# Altium PCB LED Matrix Pcb_Final.PcbDoc
Units mil, origin at the board's own origin, x right, y up, seen from the top; angles counter-clockwise.
Board outline 5310.03 x 4495.03 mil, 2 copper layers (Top Layer, Bottom Layer); 20 components, 68 nets, 198 pads, 59 vias.
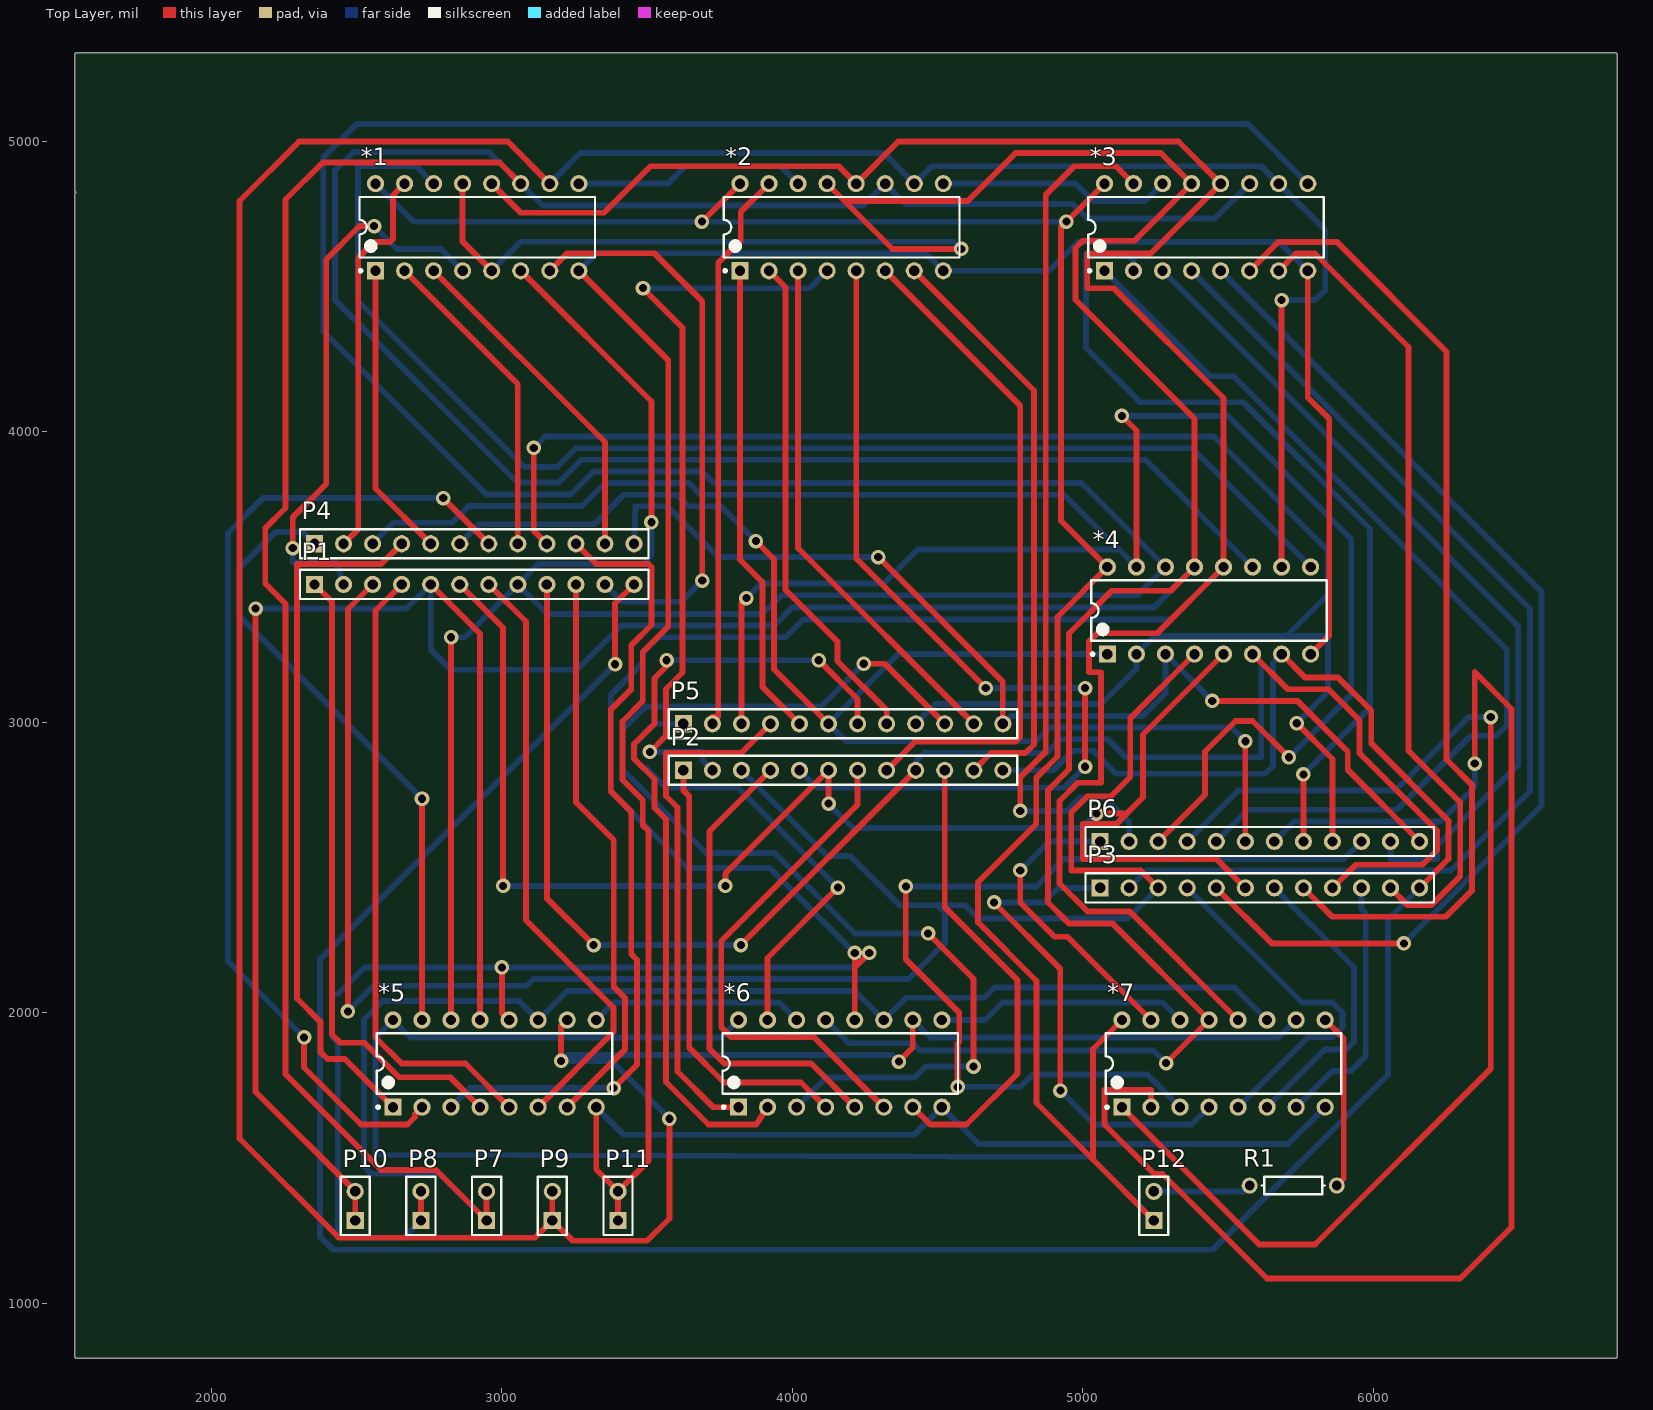
[diagram p0: Top Layer view]
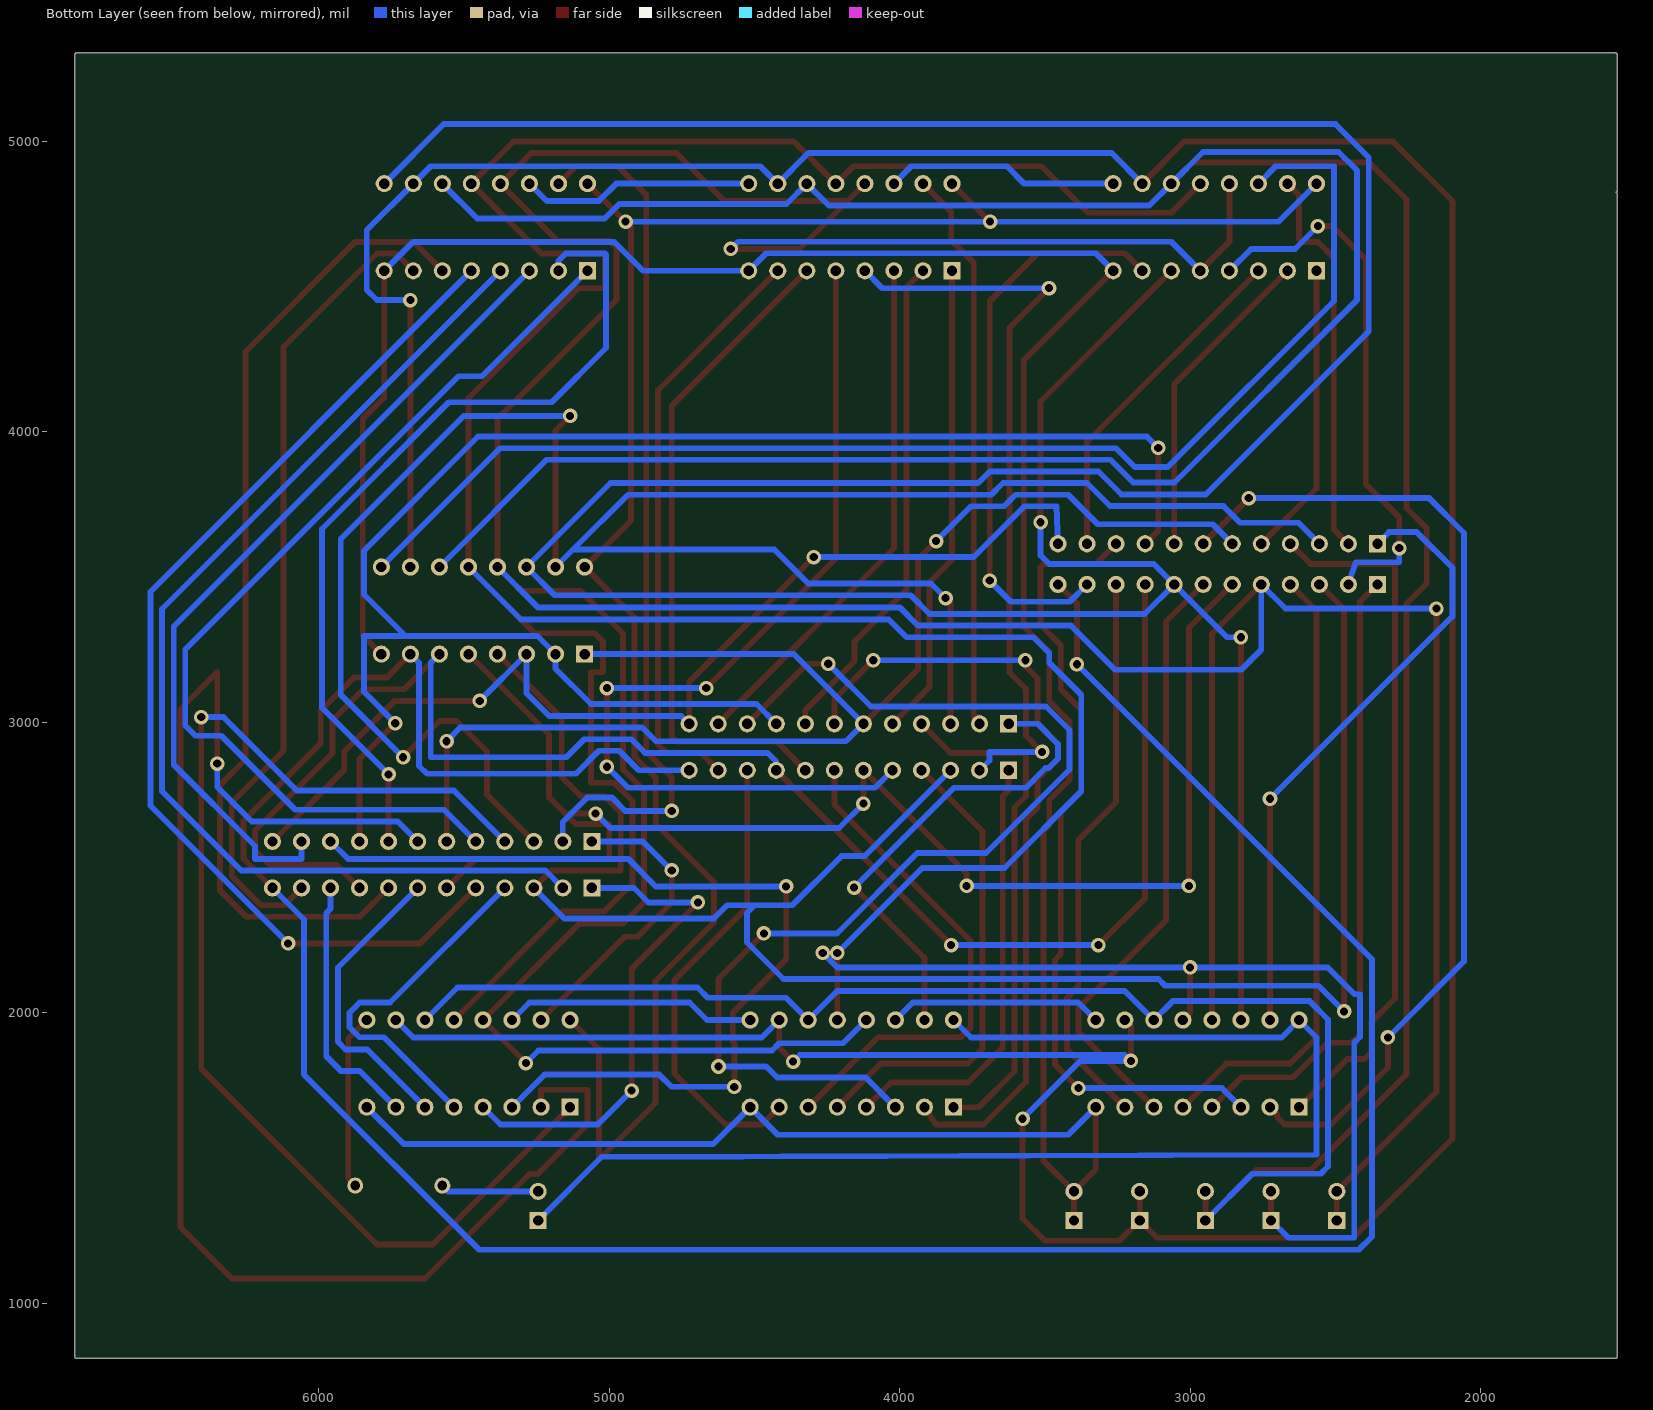
[diagram p1: Bottom Layer view, seen from below]

## Layer stack, top to bottom
Top Solder: solder mask 0.4, Solder Resist, Dk 3.5
Top Layer: signal copper 1.4
Dielectric 1: dielectric 12.6, FR-4, Dk 4.8
Bottom Layer: signal copper 1.4
Bottom Solder: solder mask 0.4, Solder Resist, Dk 3.5

## Board outline
1529.98,815 1529.98,4820 cw(c1535,4820) 1534.61,4825 cw(c1535,4830) 1529.98,4830 1529.98,5300 cw(c1535,5300) 1535,5305.02 6835,5305.02 cw(c6835,5300) 6840.02,5300 6840.02,815 cw(c6835,815) 6835,809.99 1535,809.99 cw(c1535,815)

## Design rules (kind name [scope] priority, off if disabled: settings)
Clearance [All] p1: gap=20
PolygonConnect [All] p1: connectstyle=Relief reliefconductorwidth=10 reliefentries=4 polygonreliefangle="90 Angle" airgapwidth=10
RoomDefinition "Senior design LED matrix 3.0" [InComponentClass('Senior design LED matrix 3.0')] p1: confinementstyle=ConfineIn formatcopy=TRUE lockcomponents=FALSE outline 6990,1055 12185,1055 12185,2375 6990,2375
RoutingVias [All] p1: holewidth=28 width=50 viastyle="Through Hole" minholewidth=28 minwidth=50 maxholewidth=28 maxwidth=50
SolderMaskExpansion [All] p1: expansion=4
Width [All] p1: maxlimit=40 minlimit=20 preferedwidth=20
Width Ground [InNet('Net*1_8')] p2: maxlimit=40 minlimit=30 preferedwidth=30
30 further rules are at their usual default settings.

## Components (designator, comment, footprint, x,y, rotation, side; value= is the part's Value field where it differs from the comment)
*1 "Red_1" DIP-16 2915,4705 r90 top
*2 "Red_2" DIP-16 4170,4705 r90 top
*3 "Red_3" DIP-16 5425,4705 r90 top
*4 "Ground" DIP-16 5435,3385 r90 top
*5 "Green_1" DIP-16 2975,1825 r90 top
*6 "Green_2" DIP-16 4165,1825 r90 top
*7 "Green_3" DIP-16 5485,1825 r90 top
P1 "Header 12" HDR1X12 2355,3475 r0 top
P2 "Header 12" HDR1X12 3625,2835 r0 top
P3 "Header 12" HDR1X12 5060,2430 r0 top
P4 "Header 12" HDR1X12 2355,3615 r0 top
P5 "Header 12" HDR1X12 3625,2995 r0 top
P6 "Header 12" HDR1X12 5060,2590 r0 top
P7 "11" HDR1X2 2947.5,1285 r90 top
P8 "12" HDR1X2 2721.25,1285 r90 top
P9 "10" HDR1X2 3173.75,1285 r90 top
P10 "13" HDR1X2 2495,1285 r90 top
P11 "Ground 8" HDR1X2 3400,1285 r90 top
P12 "1 (Power) 2 (Ground)" HDR1X2 5245,1285 r90 top
R1 "Res1" AXIAL-0.3 5725,1405 r180 top

## Footprints (in the part's own frame and the unit in brackets; to place one, negate y for a bottom-side part, rotate by r counter-clockwise, add the part's x,y. Pads: shape width x height; smd on the part's side, far side on the other; paste and mask are expansions set on the pad)
AXIAL-0.3 [mm] "Axial Device, Thru-Hole; 2 Leads; 0.3 in Pin Spacing"
  round 1.4 hole 0.85: 1(-3.81,0) 2(3.81,0)
  silkscreen extent -2.77,-0.76 2.77,0.76
DIP-16 [mm] "DIP; 16 Leads; Row Spacing 7.62 mm; Pitch 2.54 mm"
  rect 1.5x1.5 hole 0.9: 1(-3.81,8.89)
  round 1.5 hole 0.9: 2(-3.81,6.35) 3(-3.81,3.81) 4(-3.81,1.27) 5(-3.81,-1.27) 6(-3.81,-3.81) 7(-3.81,-6.35) 8(-3.81,-8.89) 9(3.81,-8.89) 10(3.81,-6.35) 11(3.81,-3.81) 12(3.81,-1.27) 13(3.81,1.27) 14(3.81,3.81) 15(3.81,6.35) 16(3.81,8.89)
  silkscreen extent -3.93,-10.3 2.65,10.31, body extent -3.6,-10.28 3.6,10.28, height 5.08
HDR1X2 [mm] "Connector; Header; 2 Position"
  rect 1.5x1.5 hole 0.9: 1(0,0)
  round 1.5 hole 0.9: 2(2.54,0)
  silkscreen extent -1.27,-1.27 3.81,1.27
HDR1X12 [mm] "Connector; Header; 12 Position"
  rect 1.5x1.5 hole 0.9: 1(0,0)
  round 1.5 hole 0.9: 2(2.54,0) 3(5.08,0) 4(7.62,0) 5(10.16,0) 6(12.7,0) 7(15.24,0) 8(17.78,0) 9(20.32,0) 10(22.86,0) 11(25.4,0) 12(27.94,0)
  silkscreen extent -1.27,-1.27 29.21,1.27

## Part data
*1 *2 *3 *4 *5 *6 *7: library part Component_1
P1 P2 P3 P4 P5 P6: "Header, 12-Pin"
P7 P8 P9 P10 P11 P12: library part "Header 2", "Header, 2-Pin"
R1: "Resistor"

## Via types
v1: diameter 50, hole 28, Top Layer to Bottom Layer, 59 vias

## Nets (pads, with @x,y where several pads share a name; then routed paths per layer and width w, separated by ;. In a path a pad name is that pad's centre, name@x,y a point inside that pad or via, vN(x,y) a via of type N, cw(c..) or ccw(c..) an arc to the next point about the centre after c; other vN are vias at no path point)
Net*1_1: *1.1 P4.5 | length 1018.7
  Top Layer w20: *1.1 2565,3805 P4.5
Net*1_2: *1.2 P4.8 | length 1101.5
  Top Layer w20: *1.2 3055,4165 P4.8
Net*1_3: *1.3 P4.11 | length 1184.4
  Top Layer w20: *1.3 3355,3965 P4.11
Net*1_4: *1.4 P1.2 | length 1901.4
  Top Layer w20: v1(2280,3600) 2280,3706 2395,3821 2395,4594 2510,4709 v1(2560,4709)
  Bottom Layer w20: v1(2280,3600) 2280,3551 2429,3551 P1.2 ; v1(2560,4709) 2639,4630 2790,4630 *1.4
Net*1_5: *1.5 *1.13 *2.13 *3.13 *4.13 *5.13 *6.13 *7.13 P1.5 P10.1 P10.2 | length 16767.2
  Top Layer w20: v1(2152,3392) 2152,1728 P10.2 P10.1 ; P1.5 2925,3305 *5.13 ; *1.13 2865,4655 *1.5 ; *2.13 4180,4795 ; v1(4582,4630) 4345,4630 4180,4795 ; v1(5287,1827) *7.13 5102.13,2307.87 4952.13,2307.87 4880.47,2379.53 4880.47,2766.29 4953,2838.82 4953,3306 5100,3453 5303,3453 *4.13 5385,4045 4975,4455 4975,4633 5000,4658 5178,4658 *3.13 5270,4960 4769,4960 4604,4795 4180,4795
  Bottom Layer w20: v1(2152,3392) 2672,3392 P1.5 2755,3250 2824,3181 3258.63,3181 3410.63,3333 3937,3333 4000,3396 5246,3396 *4.13 ; *1.5 3065,4655 4557,4655 v1(4582,4630) ; *6.13 4195,1895 4414.71,1895 4439.71,1870 5244,1870 v1(5287,1827)
Net*1_6: *1.6 *3.9 *4.14 *5.14 P1.8 | length 13053.7
  Top Layer w20: *5.14 v1(2825,3293) ; *1.6 3515,4105 v1(3515,3689)
  Bottom Layer w20: v1(2825,3293) 2873,3293 P1.8 ; v1(3515,3689) 3515,3575 3485,3545 3125,3545 P1.8 ; *3.9 5570,5060 2500,5060 2385,4945 2385,4346.02 2946.35,3784.67 3236,3784.67 3315.33,3864 3690,3864 3730,3824 4996,3824 *4.14 5187.89,3437.89 3962.08,3437.89 3897.18,3373 3157,3373 P1.8
Net*1_7: *1.7 P1.11 | length 1969.9
  Top Layer w20: *1.7 3225,4615 3525,4615 3690,4450 v1(3690,3488)
  Bottom Layer w20: P1.11 3414.53,3415.47 3617.47,3415.47 v1(3690,3488)
Net*1_8: *1.8 *2.8 *3.8 *4.8 *5.8 *6.8 *7.8 P11.1 P11.2 | length 10578.5
  Top Layer w20: *1.8 3573,4247 3573,3330.03 3485.47,3242.5 3485.47,3073.79 3415,3003.31 3415,2802.7 3485.47,2732.23 3485.47,2646 3505.47,2626 3505.47,1490.47 P11.2 ; *5.8 3325,1460 P11.2 ; P11.1 P11.2 ; *3.8 5775,4119 5849,4045 5849,3299 *4.8
  Bottom Layer w20: *1.8 3325,4615 4460,4615 *2.8 4884.3,4555 4983.82,4654.53 5675.47,4654.53 *3.8 ; *5.8 3420.04,1579.96 4419.96,1579.96 *6.8 4642,1548 5708,1548 *7.8
Net*1_9: *1.9 *2.14 | length 804.7
  Bottom Layer w20: *1.9 3571,4855 3631,4915 3960,4915 *2.14
Net*1_10: *1.10 *2.10 *3.10 *4.10 *5.10 *6.10 *7.10 P9.1 P9.2 | length 14073.6
  Top Layer w20: *1.10 3020,5000 2302,5000 2097,4795 2097,1567 2439,1225 3113.75,1225 P9.1 ; P9.2 P9.1 ; v1(3204,1834) 3204,1954 *5.10 ; v1(3577,1635) 3577,1292 3500,1215 3243.75,1215 P9.1 ; v1(4367,1832) 4415,1880 *6.10 ; *4.10 v1(5685,4454)
  Bottom Layer w20: *1.10 3271,4961 4314,4961 *2.10 4480,4915 5615,4915 *3.10 5835,4695 5835,4489 5800,4454 v1(5685,4454) ; v1(3577,1635) 3378,1834 v1(3204,1834) 3225,1855 4344,1855 v1(4367,1832) ; *6.10 4475,1915 5675,1915 *7.10
Net*1_11: *1.11 *2.11 *3.11 *4.11 *5.11 *6.11 *7.11 P7.1 P7.2 | length 16741.9
  Top Layer w20: P7.2 P7.1 2773.5,1459 2584.31,1459 2255,1788.31 2255,3408.67 2185.47,3478.2 2185.47,3668.2 2255,3737.73 2255,4800 2383,4928 2992,4928 *1.11
  Bottom Layer w20: P7.1 2786.5,1446 2550,1446 2525,1471 2525,1977 2588,2040 3060,2040 *5.11 3225,2075 4215,2075 *6.11 4392,2052 4661,2052 4696,2087 5523,2087 *7.11 ; *3.11 5455,4735 5016,4735 4966,4785 4390,4785 *2.11 4244.52,4779.52 3140.48,4779.52 *1.11 2956,4964 2489,4964 2425,4900 2425,4455 3053.85,3826.15 3196,3826.15 3273.85,3904 5216,3904 *4.11
Net*1_12: *1.12 *2.12 *3.12 *4.12 *5.12 *6.12 *7.12 P8.1 P8.2 | length 14383.3
  Top Layer w20: P8.1 P8.2 ; *1.12 3065,4755 3352,4755 3512,4915 4160,4915 *2.12 4365,5000 5330,5000 *3.12 5234.53,4614.53 5015.47,4614.53 5015.47,4495 5107.13,4495 5485,4117.13 *4.12 5257.01,3307.01 5050,3307.01 5022.01,3279.02 5022.01,3172.78 5063,3172.78 5063,2792 4982.94,2792 4920.47,2729.53 4920.47,2445.53 5016.84,2349.16 5160.84,2349.16 *7.12 ; v1(3000,2156) 3000,2000 *5.12 ; *6.12 4215,2156 ; v1(4215,2206) 4215,2156 ; v1(4265,2206) 4215,2156
  Bottom Layer w20: P8.1 2661.25,1225 2435,1225 2435,1896.61 2415,1916.61 2415,2064.04 2434.04,2064.04 2526,2156 v1(3000,2156) 4215,2156 v1(4265,2206) ; v1(4215,2206) 3922.59,2498.41 3639.29,2498.41 3375,2762.7 3375,3095 3485.47,3205.47 3485.47,3238.69 3539.78,3293 3977,3293 4037.76,3353.76 5303.76,3353.76 *4.12
Net*1_14: *1.14 *4.9 | length 4462.1
  Bottom Layer w20: *1.14 2705,4915 2505,4915 2505,4451 3077,3879 3190.6,3879 3255.6,3944 5376,3944 *4.9
Net*1_15: *1.15 P4.2 | length 1359.6
  Top Layer w20: P4.2 2505.34,3665.34 2505.34,4600 2559.34,4654 2615,4654 2625,4664 2625,4815 *1.15
Net*1_16: *1.16 *2.16 *3.16 *4.16 *5.16 *6.16 *7.16 P12.1 | length 11772
  Top Layer w20: v1(3689,4724) *2.16 ; *3.16 v1(4944,4724) 4925.52,4705.52 4925.52,3694.48 *4.16 4913,3363 4913,2882.43 4840,2809.43 4840,2650 4640,2450 4640,2310.72 4841,2109.72 4841,1689 5035.47,1494.53 ; *7.16 5035.47,1875.47 5035.47,1494.53 ; P12.1 5035.47,1494.53
  Bottom Layer w20: *1.16 2696,4724 v1(3689,4724) v1(4944,4724) ; *6.16 3755,1915 2685,1915 *5.16 2565,1915 2565,1511 5027,1503 P12.1
Net*2_1: *2.1 P5.5 | length 1644.9
  Top Layer w20: *2.1 3820,3560 3897,3483 3897,3123 P5.5
Net*2_2: *2.2 P5.8 | length 1727.8
  Top Layer w20: *2.2 3977,4498 3977,3456.56 4155.28,3278.28 4155.28,3211.57 4325,3041.85 P5.8
Net*2_3: *2.3 P5.11 | length 1810.6
  Top Layer w20: *2.3 4020,3600 P5.11
Net*2_4: *2.4 P2.2 | length 2616.7
  Top Layer w20: v1(3486,4495) 3622,4359 3622,3171.53 3565.47,3115 3565.47,2953.47 v1(3510,2898)
  Bottom Layer w20: v1(3486,4495) 4060,4495 *2.4 ; v1(3510,2898) 3691,2898 3691,2869 P2.2
Net*2_5: *2.5 P2.5 | length 3272.4
  Top Layer w20: *2.5 4220,3564 v1(4666,3118) ; v1(5008,2847) v1(5008,3118)
  Bottom Layer w20: P2.5 4085,2775 4936,2775 v1(5008,2847) ; v1(4666,3118) v1(5008,3118)
Net*2_6: *2.6 P2.8 | length 2305.2
  Top Layer w20: *2.6 4785,4090 4785,2950 4769.53,2934.53 4424.53,2934.53 P2.8
Net*2_7: *2.7 P2.11 | length 2045.5
  Top Layer w20: *2.7 4832.01,4142.99 4832.01,2924.01 4802.53,2894.53 4684.53,2894.53 P2.11
Net*2_9: *2.9 *3.14 | length 804.7
  Bottom Layer w20: *2.9 4976,4855 5036,4795 5215,4795 *3.14
Net*2_15: *2.15 P5.2 | length 1952.5
  Top Layer w20: P5.2 3725,3019 3745,3019 3745,4582.25 3822.75,4660 3822.75,4757.75 *2.15
Net*3_1: *3.1 P6.5 | length 3352.4
  Bottom Layer w20: *3.1 5438,4192 5519,4192 6460,3251 6460,2989 6425,2954 6336,2954 6081,2699 5569,2699 P6.5
Net*3_2: *3.2 P6.8 | length 2938.6
  Top Layer w20: P6.8 v1(5760,2821)
  Bottom Layer w20: *3.2 5175,4589.53 5150,4614.53 5015,4614.53 5011,4610.53 5011,4289 5198,4102 5552.43,4102 5989,3665.43 5989,3050 v1(5760,2821)
Net*3_3: *3.3 P6.11 | length 2868.4
  Bottom Layer w20: *3.3 6500,3330 6500,2853.99 6220,2573.99 6220,2530 6060,2530 P6.11
Net*3_4: *3.4 P3.2 | length 3792.8
  Bottom Layer w20: P3.2 5220,2490 6267.49,2490 6540,2762.51 6540,3390 *3.4
Net*3_5: *3.5 P3.5 | length 3695.2
  Top Layer w20: P3.5 5651,2239 v1(6106,2239)
  Bottom Layer w20: *3.5 6580,3450 6580,2713 v1(6106,2239)
Net*3_6: *3.6 P3.8 | length 3426.1
  Top Layer w20: *3.6 5674.53,4654.53 5874.53,4654.53 6253,4276.06 6253,2872.02 6340,2785.02 6340,2420.47 6250,2330.47 5859.53,2330.47 P3.8
Net*3_7: *3.7 P3.11 | length 2807.2
  Top Layer w20: *3.7 5734.53,4614.53 5800,4614.53 6122.1,4292.43 6122.1,2901.9 6300,2724 6300,2470 6200.47,2370.47 6119.53,2370.47 P3.11
Net*3_15: *3.15 P6.2 | length 3022.1
  Top Layer w20: v1(4785,2695) 4785,2811 4873,2899 4873,4817 4971,4915 5115,4915 *3.15
  Bottom Layer w20: v1(4785,2695) 4945.1,2695 4991.79,2741.69 5075,2741.69 5160,2656.69 P6.2
Net*4_1: *4.1 P4.6 P5.6 P6.6 | length 4792
  Top Layer w20: v1(3875,3624) 3937,3562 3937,3183 P5.6 ; P6.6 v1(5560,2935)
  Bottom Layer w20: P4.6 2922,3682 3318,3682 3420,3784 3601,3784 3641,3744 3755,3744 v1(3875,3624) ; *4.1 4365,3235 P5.6 4185,2935 4839.57,2935 4886.57,2982 5513,2982 v1(5560,2935)
Net*4_2: *4.2 P4.9 P5.9 P6.9 | length 5993.1
  Top Layer w20: v1(3110,3945) 3110,3660 P4.9 ; v1(5737,2997.1) 5860,2874.1 P6.9
  Bottom Layer w20: v1(3110,3945) 3149,3984 5452.21,3984 5845,3591.21 5845,3440 5702,3297 ; P5.9 4492.78,3062.78 5063,3062.78 5185,3184.78 *4.2 5247,3297 5702,3297 ; v1(5737,2997.1) 5845,3105.1 5845,3297 5702,3297
Net*4_3: *4.3 P4.12 P5.12 P6.12 | length 3706.8
  Top Layer w20: v1(4296,3569) 4725,3140 P5.12 ; v1(5446,3074) 5739,3074 5913,2900 5913,2837 P6.12
  Bottom Layer w20: P4.12 3460,3744 3570,3744 3745,3569 v1(4296,3569) ; P5.12 4752,3022 5207,3022 5285,3100 *4.3 v1(5446,3074)
Net*4_4: *4.4 P1.3 P2.3 P3.3 | length 6780.5
  Top Layer w20: v1(2470,2005) 2470,3390 P1.3 ; P3.3 5200,2490 4960.47,2490 4960.47,2689.53 5016.39,2745.44 5097.44,2745.44 5164.05,2812.06 5164.05,3014.05 *4.4
  Bottom Layer w20: v1(2470,2005) 2558,2093 3086,2093 3109,2116 4400,2116 4526,2242 4526,2344 4500.08,2369.92 ; P2.3 4120.05,2539.95 4200,2539.95 4369.95,2370 4500,2370 4500.08,2369.92 ; P3.3 5155,2325 4640,2325 4595.08,2369.92 4500.08,2369.92
Net*4_5: *4.5 P1.6 P2.6 P3.6 | length 5261.7
  Top Layer w20: P1.6 3004,3326 v1(3004,2437) ; v1(3770,2437) 3770,2480 P2.6 v1(4125,2720) ; v1(5047,2686) 5152.02,2685.91 ; *4.5 5208,2958 5208,2742 ; P3.6 5460,2530 5000.47,2530 5000.47,2649.53 5115.71,2649.53 5152.02,2685.91 ; 5152.02,2685.91 5152.09,2685.91 5208,2742 ; 5152.02,2685.91 5208,2742
  Bottom Layer w20: v1(3004,2437) v1(3770,2437) ; v1(4125,2720) 4209,2636 4997,2636 v1(5047,2686)
Net*4_6: *4.6 P1.9 P2.9 P3.9 | length 5746.1
  Top Layer w20: P1.9 3155,2394 v1(3316,2233) ; v1(3823,2233) P2.9 ; *4.6 5706,3114 5846.22,3114 5953.36,3006.86 5953.36,2893.59 6220,2626.95 6220,2560 6170,2510 5940,2510 P3.9
  Bottom Layer w20: v1(3316,2233) v1(3823,2233) ; P2.9 4425,2865 4455,2895 4877,2895 4924,2942 5086,2942 5148,2880 5615,2880 5615,3205 *4.6
Net*4_7: *4.7 P1.12 P2.12 P3.12 | length 9877.8
  Top Layer w20: v1(3390,3200) 3390,3410 P1.12 ; *4.7 5766,3154 5880.1,3154 5993.36,3040.74 5993.36,2928.16 6260,2661.52 6260,2530 P3.12
  Bottom Layer w20: v1(3390,3200) 2374,2184 2374,1229 2419,1184 5448,1184 6051,1787 6051,2321 P3.12 ; P2.12 4899,2835 4966,2902 5036,2902 5115,2823 5628,2823 5655,2850 5655,3205 *4.7
Net*4_15: *4.15 P4.3 P5.3 P6.3 | length 7736
  Top Layer w20: P5.3 3825,3411 v1(3842,3428) ; v1(5135,4055) 5185,4005 *4.15 ; P6.3 5421,2751 5421,2900 5526,3005 5585,3005 v1(5710,2880)
  Bottom Layer w20: P4.3 2627,3687 2827.94,3687 2885.61,3744.67 3276,3744.67 3355.33,3824 3644.56,3824 3684.56,3784 4936,3784 5125,3595 ; v1(3842,3428) 3892,3478 4315,3478 4432,3595 5125,3595 ; v1(5135,4055) 5501.21,4055 5925,3631.21 5925,3095 v1(5710,2880) ; *4.15 5125,3595
Net*5_1: *5.1 P4.4 | length 2430.2
  Top Layer w20: *5.1 2458.89,1841.11 2400,1841.11 2375,1866.11 2375,1969.43 2295,2049.43 2295,3545 2585,3545 P4.4
Net*5_2: *5.2 P4.7 | length 3480.1
  Top Layer w20: v1(2319,1915) 2319,1811.14 2515.14,1615 2675,1615 2701,1641 2701,1651 *5.2 ; v1(2798,3772) P4.7
  Bottom Layer w20: v1(2319,1915) 2057,2177 2057,3652 2177,3772 v1(2798,3772)
Net*5_3: *5.3 P4.10 | length 2803.3
  Top Layer w20: P4.10 3325,3545 3505,3545 3515,3535 3515,3335 3445.47,3265.47 3445.47,3113.79 3375,3043.31 3375,2762.7 3445.47,2692.23 3445.47,2201.96 3465.47,2181.96 3465.47,1821.42 v1(3384.53,1740.47)
  Bottom Layer w20: *5.3 2890.47,1740.47 v1(3384.53,1740.47)
Net*5_4: *5.4 P1.1 | length 2188.4
  Top Layer w20: P1.1 2415,3415 2415,1925 2443.39,1896.61 2526.82,1896.61 2645.43,1778 2822,1778 *5.4
Net*5_5: *5.5 P1.4 | length 2156.7
  Top Layer w20: P1.4 2565,3385 2565,1915 2655,1825 2875,1825 *5.5
Net*5_6: *5.6 P1.7 | length 2085.4
  Top Layer w20: P1.7 3083,3347 3083,2319 3384.53,2017.47 3384.53,1934.53 *5.6
Net*5_7: *5.7 P1.10 | length 1952.9
  Top Layer w20: *5.7 3424.53,1874.53 3424.53,2049.74 3385,2089.26 3385,2595 3255,2725 P1.10
Net*5_9: *5.9 *6.14 | length 739.7
  Bottom Layer w20: *5.9 3385,2035 3955,2035 *6.14
Net*5_15: *5.15 P4.1 | length 2142.7
  Top Layer w20: *5.15 v1(2725,2737)
  Bottom Layer w20: P4.1 2315,3655 2219.98,3655 2097,3532.02 2097,3365 v1(2725,2737)
Net*6_1: *6.1 P5.4 | length 1775.6
  Top Layer w20: *6.1 3727.5,1675 3605,1797.5 3605,2706.47 3565.47,2746 3565.47,2895 3825,2895 P5.4
Net*6_2: *6.2 P5.7 | length 2785.5
  Top Layer w20: v1(3566.97,3214) 3566.97,3193.23 3525.47,3151.73 3525.47,2995.47 3455,2925 3455,2875 3525.47,2804.53 3525.47,2706 3565,2666.47 3565,1761.91 3711.91,1615 3875,1615 *6.2 ; v1(4091,3214) 4225,3080 P5.7
  Bottom Layer w20: v1(3566.97,3214) v1(4091,3214)
Net*6_3: *6.3 P5.10 | length 3903.1
  Top Layer w20: v1(4246,3202) 4318,3202 P5.10 ; v1(4467.85,2273.32) 4624,2117.17 v1(4624,1815)
  Bottom Layer w20: *6.3 4117,1777 4422,1777 4460,1815 v1(4624,1815) ; v1(4246,3202) 4099,3055 3496,3055 3415,2974 3415,2837.7 3702.7,2550 3939.71,2550 4216.39,2273.32 v1(4467.85,2273.32)
Net*6_4: *6.4 P2.1 | length 1518.2
  Top Layer w20: P2.1 3625,2766 3645.47,2745.53 3645.47,1879.53 3765,1760 4030,1760 *6.4
Net*6_5: *6.5 P2.4 | length 1629.3
  Top Layer w20: P2.4 3715,2625 3715,1875.94 3765.94,1825 4065,1825 *6.5
Net*6_6: *6.6 P2.7 | length 1752.9
  Top Layer w20: P2.7 4225,2716.67 3755.47,2247.14 3755.47,1950 3790,1915.47 4074.53,1915.47 *6.6
Net*6_7: *6.7 P2.10 | length 1606.7
  Top Layer w20: *6.7 4475,1615 4600,1615 4776,1791 4776,2112.35 4525,2363.35 P2.10
Net*6_9: *6.9 *7.14 | length 869.7
  Bottom Layer w20: *6.9 4664,1975 4724,2035 5275,2035 *7.14
Net*6_15: *6.15 P5.1 | length 1691.1
  Top Layer w20: *6.15 3915,2189 v1(4157,2431)
  Bottom Layer w20: P5.1 3525,2995 3455,2925 3455,2875 3487.3,2842.7 3497.77,2842.7 3565.47,2775 3813,2775 v1(4157,2431)
Net*7_1: *7.1 P6.4 | length 4149.8
  Top Layer w20: *7.1 5608,1202 5800,1202 6405,1807 v1(6405,3018)
  Bottom Layer w20: P6.4 5535.26,2765.26 6075.97,2765.26 6328.72,3018 v1(6405,3018)
Net*7_2: *7.2 P6.7 | length 5160.4
  Top Layer w20: *7.2 5235,1735 5075.47,1735 5075.47,1615.47 5246.42,1444.53 5275,1444.53 5634.53,1085 6300,1085 6476.71,1261.71 6476.71,3046.29 6350,3173 v1(6350,2858)
  Bottom Layer w20: P6.7 5728.19,2658.19 6231.08,2658.19 6350,2777.11 v1(6350,2858)
Net*7_3: *7.3 P6.10 | length 3231.1
  Top Layer w20: v1(4391,2435) 4391,2184 4575,2000 4575,1899 4569,1893 4569,1746 v1(4570,1745)
  Bottom Layer w20: v1(4391,2435) 4840,2435 4935,2530 5900,2530 P6.10 ; v1(4570,1745) 4786,1745 4828,1787 5223,1787 *7.3
Net*7_4: *7.4 P3.1 | length 1713.5
  Top Layer w20: v1(4695,2380) 4923,2152 v1(4923,1732)
  Bottom Layer w20: v1(4695,2380) 4865,2380 4915,2430 P3.1 ; v1(4923,1732) 5040,1615 5375,1615 *7.4
Net*7_5: *7.5 P3.4 | length 1236.1
  Bottom Layer w20: P3.4 5755,2035 5859.53,2035 5894.53,2000 5894.53,1950 5860,1915.47 5775.47,1915.47 *7.5
Net*7_6: *7.6 P3.7 | length 1036.4
  Bottom Layer w20: *7.6 5833.56,1873.56 5908.09,1873.56 5934.53,1900 5934.53,2155.47 P3.7
Net*7_7: *7.7 P3.10 | length 898.7
  Bottom Layer w20: *7.7 5860,1800 5925,1800 5975,1850 5975,2343 5960,2358 P3.10
Net*7_9: *7.9 R1.1 | length 606.5
  Top Layer w20: *7.9 5899,1911 5899,1429 R1.1
Net*7_15: *7.15 P6.1 | length 1044.2
  Top Layer w20: v1(4785,2490) 4785,2380 4903,2262 4948,2262 *7.15
  Bottom Layer w20: v1(4785,2490) 4885,2590 P6.1
NetP12_2: P12.2 R1.2 | length 338.3
  Bottom Layer w20: P12.2 5555,1385 R1.2

## Silkscreen, mask and mechanical layers (free items; w line width, h text height)
Mechanical 1:
  lines w10: 1535,815 1535,4830 1535,5300 6835,5300 6835,815 1535,815